# EAGLE board OsdPark#2 (EAGLE 6.4)
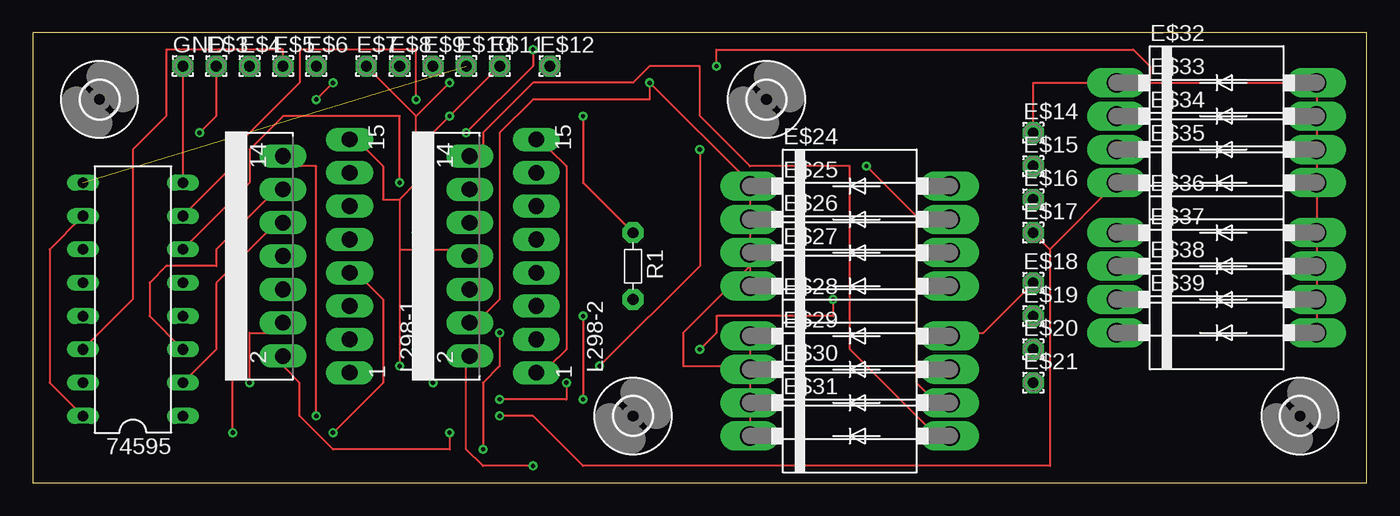
[diagram p0: board, top side]
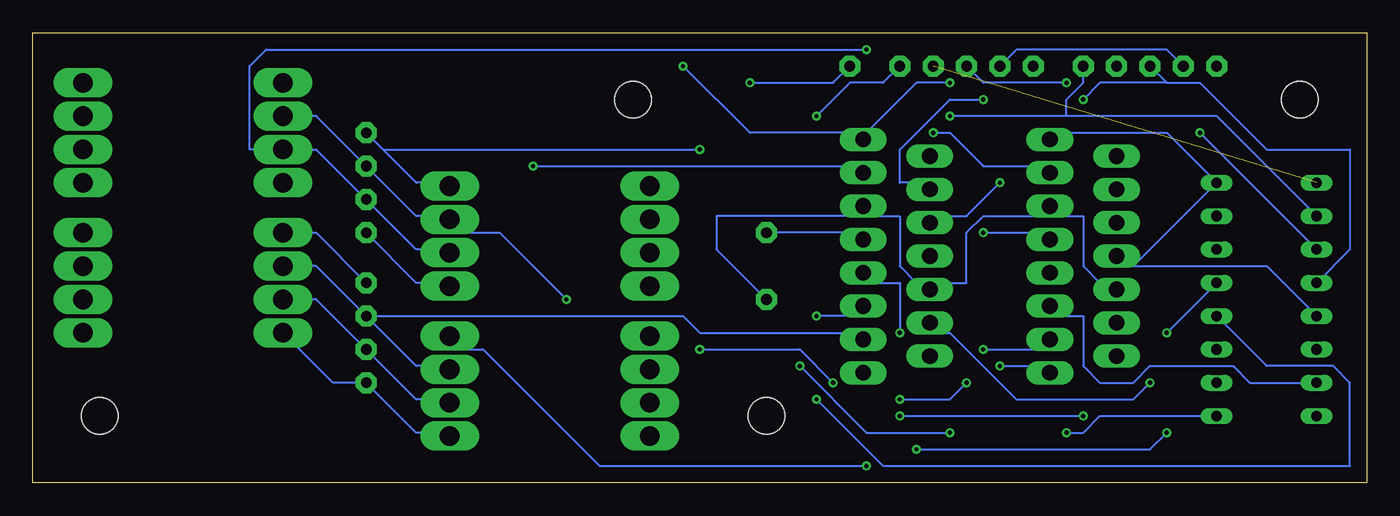
[diagram p1: board, bottom side, seen from below]

Size 101.6 x 34.29 mm. Coordinates in mm from the lower left corner, seen from the top.
Outline: 0,34.29 0,0 101.6,0 101.6,34.29 0,34.29
Copper layers (1*16): Top 0.0356mm / dielectric 1.5011mm / Bottom 0.0356mm
Design rules "LaenPCBOrder": minimum track width 6mil, minimum drill 13mil, track to track 6mil, track to pad 6mil, pad to pad 6mil, via to via 6mil, smd to smd 6mil, copper to edge 15mil, drill to drill 6mil, minimum pad ring 7mil, minimum via ring 7mil, stop-mask expansion 4mil, vias tented up to drill 0mil, thermal gap 10mil

## Footprints (pad centres in the part's own frame; a part is rotated, then mirrored left to right if it is on the bottom)
DIL16 = drill 0.813 long: 1 -8.89,-3.81; 2 -6.35,-3.81; 3 -3.81,-3.81; 4 -1.27,-3.81; 5 1.27,-3.81; 6 3.81,-3.81; 7 6.35,-3.81; 8 8.89,-3.81; 9 8.89,3.81; 10 6.35,3.81; 11 3.81,3.81; 12 1.27,3.81; 13 -1.27,3.81; 14 -3.81,3.81; 15 -6.35,3.81; 16 -8.89,3.81
2,8 = hole 2.8: 0,0
1,6/0,8 = drill 0.813 pad 1.6 octagon: 1 0,0
DO201-15 = drill 1.499 long: A 7.62,0; C -7.62,0
MULTIWATT-15 = drill 1.2 long: 1 -8.89,-7.62; 2 -7.62,-2.54; 3 -6.35,-7.62; 4 -5.08,-2.54; 5 -3.81,-7.62; 6 -2.54,-2.54; 7 -1.27,-7.62; 8 0,-2.54; 9 1.27,-7.62; 10 2.54,-2.54; 11 3.81,-7.62; 12 5.08,-2.54; 13 6.35,-7.62; 14 7.62,-2.54; 15 8.89,-7.62
R-5 = drill 0.813 pad 1.6 octagon: 1 -2.54,0; 2 2.54,0

## Placement (x,y rotation side)
74595  74595  [DIL16]  7.62,13.97 90 top
E$1  [2,8]  55.88,29.21 0 top
E$3  [1,6/0,8]  13.97,31.75 0 top
E$4  [1,6/0,8]  16.51,31.75 0 top
E$5  [1,6/0,8]  19.05,31.75 0 top
E$6  [1,6/0,8]  21.59,31.75 0 top
E$7  [1,6/0,8]  25.4,31.75 0 top
E$8  [1,6/0,8]  27.94,31.75 0 top
E$9  [1,6/0,8]  30.48,31.75 0 top
E$10  [1,6/0,8]  33.02,31.75 0 top
E$11  [1,6/0,8]  35.56,31.75 0 top
E$12  [1,6/0,8]  39.37,31.75 0 top
E$14  [1,6/0,8]  76.2,26.67 0 top
E$15  [1,6/0,8]  76.2,24.13 0 top
E$16  [1,6/0,8]  76.2,21.59 0 top
E$17  [1,6/0,8]  76.2,19.05 0 top
E$18  [1,6/0,8]  76.2,15.24 0 top
E$19  [1,6/0,8]  76.2,12.7 0 top
E$20  [1,6/0,8]  76.2,10.16 0 top
E$21  [1,6/0,8]  76.2,7.62 0 top
E$24  [DO201-15]  62.23,22.61 0 top
E$25  [DO201-15]  62.23,20.07 0 top
E$26  [DO201-15]  62.23,17.53 0 top
E$27  [DO201-15]  62.23,14.99 0 top
E$28  [DO201-15]  62.23,11.18 0 top
E$29  [DO201-15]  62.23,8.64 0 top
E$30  [DO201-15]  62.23,6.1 0 top
E$31  [DO201-15]  62.23,3.56 0 top
E$32  [DO201-15]  90.17,30.48 0 top
E$33  [DO201-15]  90.17,27.94 0 top
E$34  [DO201-15]  90.17,25.4 0 top
E$35  [DO201-15]  90.17,22.86 0 top
E$36  [DO201-15]  90.17,19.05 0 top
E$37  [DO201-15]  90.17,16.51 0 top
E$38  [DO201-15]  90.17,13.97 0 top
E$39  [DO201-15]  90.17,11.43 0 top
E$40  [2,8]  5.08,29.21 0 top
E$41  [2,8]  96.52,5.08 0 top
E$42  [2,8]  45.72,5.08 0 top
GND  [1,6/0,8]  11.43,31.75 0 top
L298-1  L298  [MULTIWATT-15]  16.51,17.27 90 top
L298-2  L298  [MULTIWATT-15]  30.73,17.27 90 top
R1  10K  [R-5]  45.72,16.51 270 top

## Library data of the parts
74595 = 74xx-us
E$1 E$40-E$42 = holes
E$3-E$12 E$14-E$21 GND = wirepad
E$24-E$39 = diode
L298-1 L298-2 = st-microelectronics
R1 = discrete

## Nets
S$1: 74595.8 74595.13 E$7.1 E$32.A E$33.A E$34.A E$35.A E$36.A E$37.A E$38.A E$39.A GND.1 L298-1.1 L298-1.8 L298-1.15 L298-2.1 L298-2.8 L298-2.15
S$2: 74595.10 74595.16 E$6.1 E$11.1 L298-1.9 L298-2.9 R1.1
S$3: 74595.11 E$3.1 E$8.1
S$4: 74595.12 E$4.1 E$9.1
S$5: 74595.14 E$5.1
S$6: 74595.9 E$10.1
S$7: E$14.1 E$24.A E$32.C L298-1.2
S$8: E$15.1 E$25.A E$33.C L298-1.3
S$9: E$12.1 E$24.C E$25.C E$26.C E$27.C E$28.C E$29.C E$30.C E$31.C L298-1.4 L298-2.4
S$10: 74595.15 L298-1.5
S$11: L298-1.6 L298-1.11 L298-2.6 L298-2.11 R1.2
S$12: 74595.1 L298-1.7
S$13: 74595.2 L298-1.10
S$14: 74595.3 L298-1.12
S$15: E$16.1 E$26.A E$34.C L298-1.13
S$16: E$17.1 E$27.A E$35.C L298-1.14
S$17: E$18.1 E$28.A E$36.C L298-2.2
S$18: E$19.1 E$29.A E$37.C L298-2.3
S$19: E$20.1 E$30.A E$38.C L298-2.13
S$20: E$21.1 E$31.A E$39.C L298-2.14
S$21: 74595.4 L298-2.5
S$22: 74595.5 L298-2.7
S$23: 74595.6 L298-2.10
S$24: 74595.7 L298-2.12

## Tracks (layer width: path | path; a pad name or v marks a point on that pad's centre or on a via)
S$1  (via drill 0.33)
  Top 0.152: GND.1 74595.8 | E$39.A E$38.A E$37.A E$36.A E$35.A E$34.A E$33.A E$32.A 85.09,30.48 85.09,31.75 83.82,33.02 52.07,33.02 v52.07,31.75 | L298-2.1 39.37,8.89 40.64,10.16 40.64,24.13 39.37,25.4 L298-2.15 | 29.21,27.94 E$7.1 | 29.21,27.94 29.21,22.86 27.94,21.59 | 27.94,21.59 26.67,21.59 26.67,24.13 24.13,26.67 L298-1.15 | 27.94,21.59 27.94,17.78 | 27.94,17.78 v27.94,8.89 | 27.94,17.78 33.02,17.78 L298-2.8 | 29.21,27.94 v31.75,30.48
  Bottom 0.152: 74595.13 7.62,16.51 17.78,16.51 | 17.78,16.51 19.05,16.51 L298-1.8 17.78,16.51 | 17.78,16.51 74595.8 15.24,26.67 24.13,26.67 L298-1.15 | v27.94,8.89 24.13,8.89 L298-1.1 | v31.75,30.48 34.29,30.48 38.1,26.67 L298-2.15 39.37,26.67 46.99,26.67 v52.07,31.75
S$2  (via drill 0.33)
  Top 0.152: 74595.16 1.27,7.62 1.27,17.78 74595.10 | E$11.1 v31.75,27.94 30.48,26.67 30.48,20.32 v29.21,19.05 | R1.1 41.91,22.86 v41.91,27.94
  Bottom 0.152: R1.1 39.37,19.05 L298-2.9 | E$6.1 21.59,30.48 22.86,29.21 22.86,27.94 | 22.86,27.94 11.43,27.94 74595.10 | 22.86,27.94 v31.75,27.94 | v29.21,19.05 24.13,19.05 L298-1.9 | v41.91,27.94 39.37,30.48 36.83,30.48 E$11.1
S$3  (via drill 0.33)
  Top 0.152: v12.7,26.67 13.97,27.94 E$3.1
  Bottom 0.152: v12.7,26.67 74595.11 | E$8.1 26.67,33.02 15.24,33.02 E$3.1
S$4  (via drill 0.33)
  Top 0.152: v21.59,29.21 v22.86,30.48
  Bottom 0.152: 74595.12 1.27,17.78 1.27,25.4 7.62,25.4 12.7,30.48 15.24,30.48 | E$4.1 15.24,30.48 | E$9.1 29.21,30.48 v22.86,30.48 | v21.59,29.21 20.32,30.48 15.24,30.48
S$5
  Top 0.152: 74595.14 7.62,13.97 7.62,25.4 10.16,27.94 10.16,33.02 19.05,33.02 E$5.1
S$6  (1 unrouted)
S$7  (via drill 0.33)
  Top 0.152: v31.75,3.81 31.75,2.54 22.86,2.54 20.32,5.08 20.32,7.62 19.05,8.89 L298-1.2 | v43.18,8.89 50.8,16.51 v50.8,25.4 | E$32.C 76.2,30.48 E$14.1
  Bottom 0.152: 74.93,25.4 72.39,22.86 69.85,22.86 E$24.A | 74.93,25.4 E$14.1 | v31.75,3.81 38.1,3.81 v43.18,8.89 | 74.93,25.4 v50.8,25.4
S$8  (via drill 0.33)
  Top 0.152: v29.21,10.16 30.48,8.89 v30.48,7.62 | v35.56,6.35 40.64,6.35 v40.64,7.62 | v50.8,10.16 52.07,11.43 52.07,12.7 60.96,12.7 v60.96,13.97
  Bottom 0.152: v29.21,10.16 24.13,10.16 L298-1.3 | v30.48,7.62 31.75,6.35 v35.56,6.35 | v40.64,7.62 43.18,10.16 v50.8,10.16 | v60.96,13.97 66.04,19.05 69.85,19.05 E$25.A 69.85,20.32 72.39,20.32 E$15.1 80.01,27.94 E$33.C
S$9  (via drill 0.33)
  Top 0.152: v16.51,7.62 16.51,11.43 19.05,11.43 L298-1.4 | E$31.C E$30.C E$29.C 54.61,8.89 | E$28.C 54.61,8.89 | 54.61,16.51 E$27.C | 54.61,8.89 49.53,8.89 49.53,11.43 54.61,16.51 | 54.61,16.51 E$26.C E$25.C E$24.C 54.61,22.86 v46.99,30.48 46.99,29.21 38.1,29.21 35.56,26.67 35.56,13.97 34.29,12.7 L298-2.4
  Bottom 0.152: v16.51,7.62 17.78,6.35 26.67,6.35 31.75,11.43 33.02,11.43 L298-2.4 | E$12.1 40.64,30.48 v46.99,30.48
S$10
  Bottom 0.152: 74595.15 8.89,7.62 10.16,8.89 16.51,8.89 17.78,7.62 20.32,7.62 21.59,8.89 21.59,12.7 24.13,12.7 L298-1.5
S$11
  Bottom 0.152: 24.13,20.32 21.59,20.32 21.59,16.51 20.32,15.24 19.05,15.24 L298-1.6 | R1.2 49.53,17.78 49.53,20.32 39.37,20.32 L298-2.11 38.1,20.32 35.56,20.32 35.56,16.51 34.29,15.24 L298-2.6 33.02,15.24 30.48,15.24 30.48,19.05 29.21,20.32 24.13,20.32 | 24.13,20.32 L298-1.11
S$12  (via drill 0.33)
  Top 0.152: v22.86,3.81 26.67,7.62 26.67,13.97 24.13,16.51 L298-1.7
  Bottom 0.152: 74595.1 20.32,5.08 21.59,3.81 v22.86,3.81
S$13
  Top 0.152: 74595.2 13.97,10.16 13.97,15.24 19.05,20.32 L298-1.10
S$14
  Top 0.152: 74595.3 8.89,12.7 8.89,15.24 10.16,16.51 13.97,16.51 13.97,17.78 19.05,22.86 L298-1.12
S$15  (via drill 0.33)
  Top 0.152: v33.02,26.67 38.1,31.75 v38.1,33.02
  Bottom 0.152: E$26.A 69.85,17.78 72.39,17.78 E$16.1 80.01,25.4 E$34.C 85.09,25.4 85.09,31.75 83.82,33.02 v38.1,33.02 | v33.02,26.67 31.75,26.67 29.21,24.13 24.13,24.13 L298-1.13
S$16  (via drill 0.33)
  Top 0.152: v21.59,5.08 21.59,24.13 19.05,24.13 L298-1.14 | v35.56,5.08 38.1,5.08 41.91,1.27 77.47,1.27 77.47,17.78 | E$17.1 77.47,17.78 | 77.47,17.78 E$35.C
  Bottom 0.152: E$17.1 72.39,15.24 69.85,15.24 E$27.A | v35.56,5.08 v21.59,5.08
S$17  (via drill 0.33)
  Top 0.152: v38.1,1.27 34.29,1.27 33.02,2.54 33.02,8.89 L298-2.2 | E$18.1 72.39,11.43 69.85,11.43 E$28.A
  Bottom 0.152: E$18.1 80.01,19.05 E$36.C | v38.1,1.27 58.42,1.27 67.31,10.16 69.85,10.16 E$28.A
S$18
  Bottom 0.152: E$19.1 72.39,8.89 69.85,8.89 E$29.A | E$19.1 52.07,12.7 50.8,11.43 39.37,11.43 L298-2.3 | E$37.C 80.01,16.51 E$19.1
S$19  (via drill 0.33)
  Top 0.152: v63.5,24.13 67.31,20.32 67.31,7.62 69.85,5.08 E$30.A
  Bottom 0.152: E$30.A 69.85,6.35 72.39,6.35 E$20.1 80.01,13.97 E$38.C | v63.5,24.13 39.37,24.13 L298-2.13
S$20
  Top 0.152: L298-2.14 34.29,25.4 34.29,26.67 38.1,30.48 45.72,30.48 46.99,31.75 50.8,31.75 50.8,27.94 54.61,24.13 62.23,24.13 62.23,10.16 69.85,2.54 E$31.A
  Bottom 0.152: E$31.A 69.85,3.81 72.39,3.81 E$21.1 78.74,7.62 E$39.C
S$21  (via drill 0.33)
  Top 0.152: v41.91,12.7 v41.91,6.35
  Bottom 0.152: 74595.4 7.62,8.89 2.54,8.89 1.27,7.62 1.27,1.27 36.83,1.27 v41.91,6.35 | v41.91,12.7 39.37,12.7 L298-2.5
S$22  (via drill 0.33)
  Top 0.152: v15.24,3.81 v15.24,11.43 | v34.29,2.54 34.29,7.62 35.56,8.89 v35.56,11.43
  Bottom 0.152: v15.24,11.43 74595.5 | v15.24,3.81 16.51,2.54 v34.29,2.54 | v35.56,11.43 35.56,15.24 38.1,15.24 L298-2.7
S$23  (via drill 0.33)
  Top 0.152: 74595.6 16.51,22.86 16.51,25.4 19.05,27.94 27.94,27.94 v27.94,22.86
  Bottom 0.152: v27.94,22.86 30.48,20.32 33.02,20.32 L298-2.10
S$24  (via drill 0.33)
  Top 0.152: 74595.7 15.24,24.13 15.24,25.4 20.32,30.48 20.32,33.02 29.21,33.02 v29.21,29.21
  Bottom 0.152: v29.21,29.21 31.75,29.21 35.56,25.4 35.56,22.86 34.29,22.86 L298-2.12

## Text on the board
tNames: GND | SHCP | STCP | DS | +5V | GND | SHCP | STCP | DS | +5V | +12V | O11 | O12 | O13 | O14 | O21 | O22 | O23 | O24